# Altium PCB PCB_PH.PcbDoc
Units mil, origin at the board's own origin, x right, y up, seen from the top; angles counter-clockwise.
Board outline 2598.43 x 2519.69 mil, 2 copper layers (Top Layer, Bottom Layer); 26 components, 22 nets, 84 pads, 51 vias.
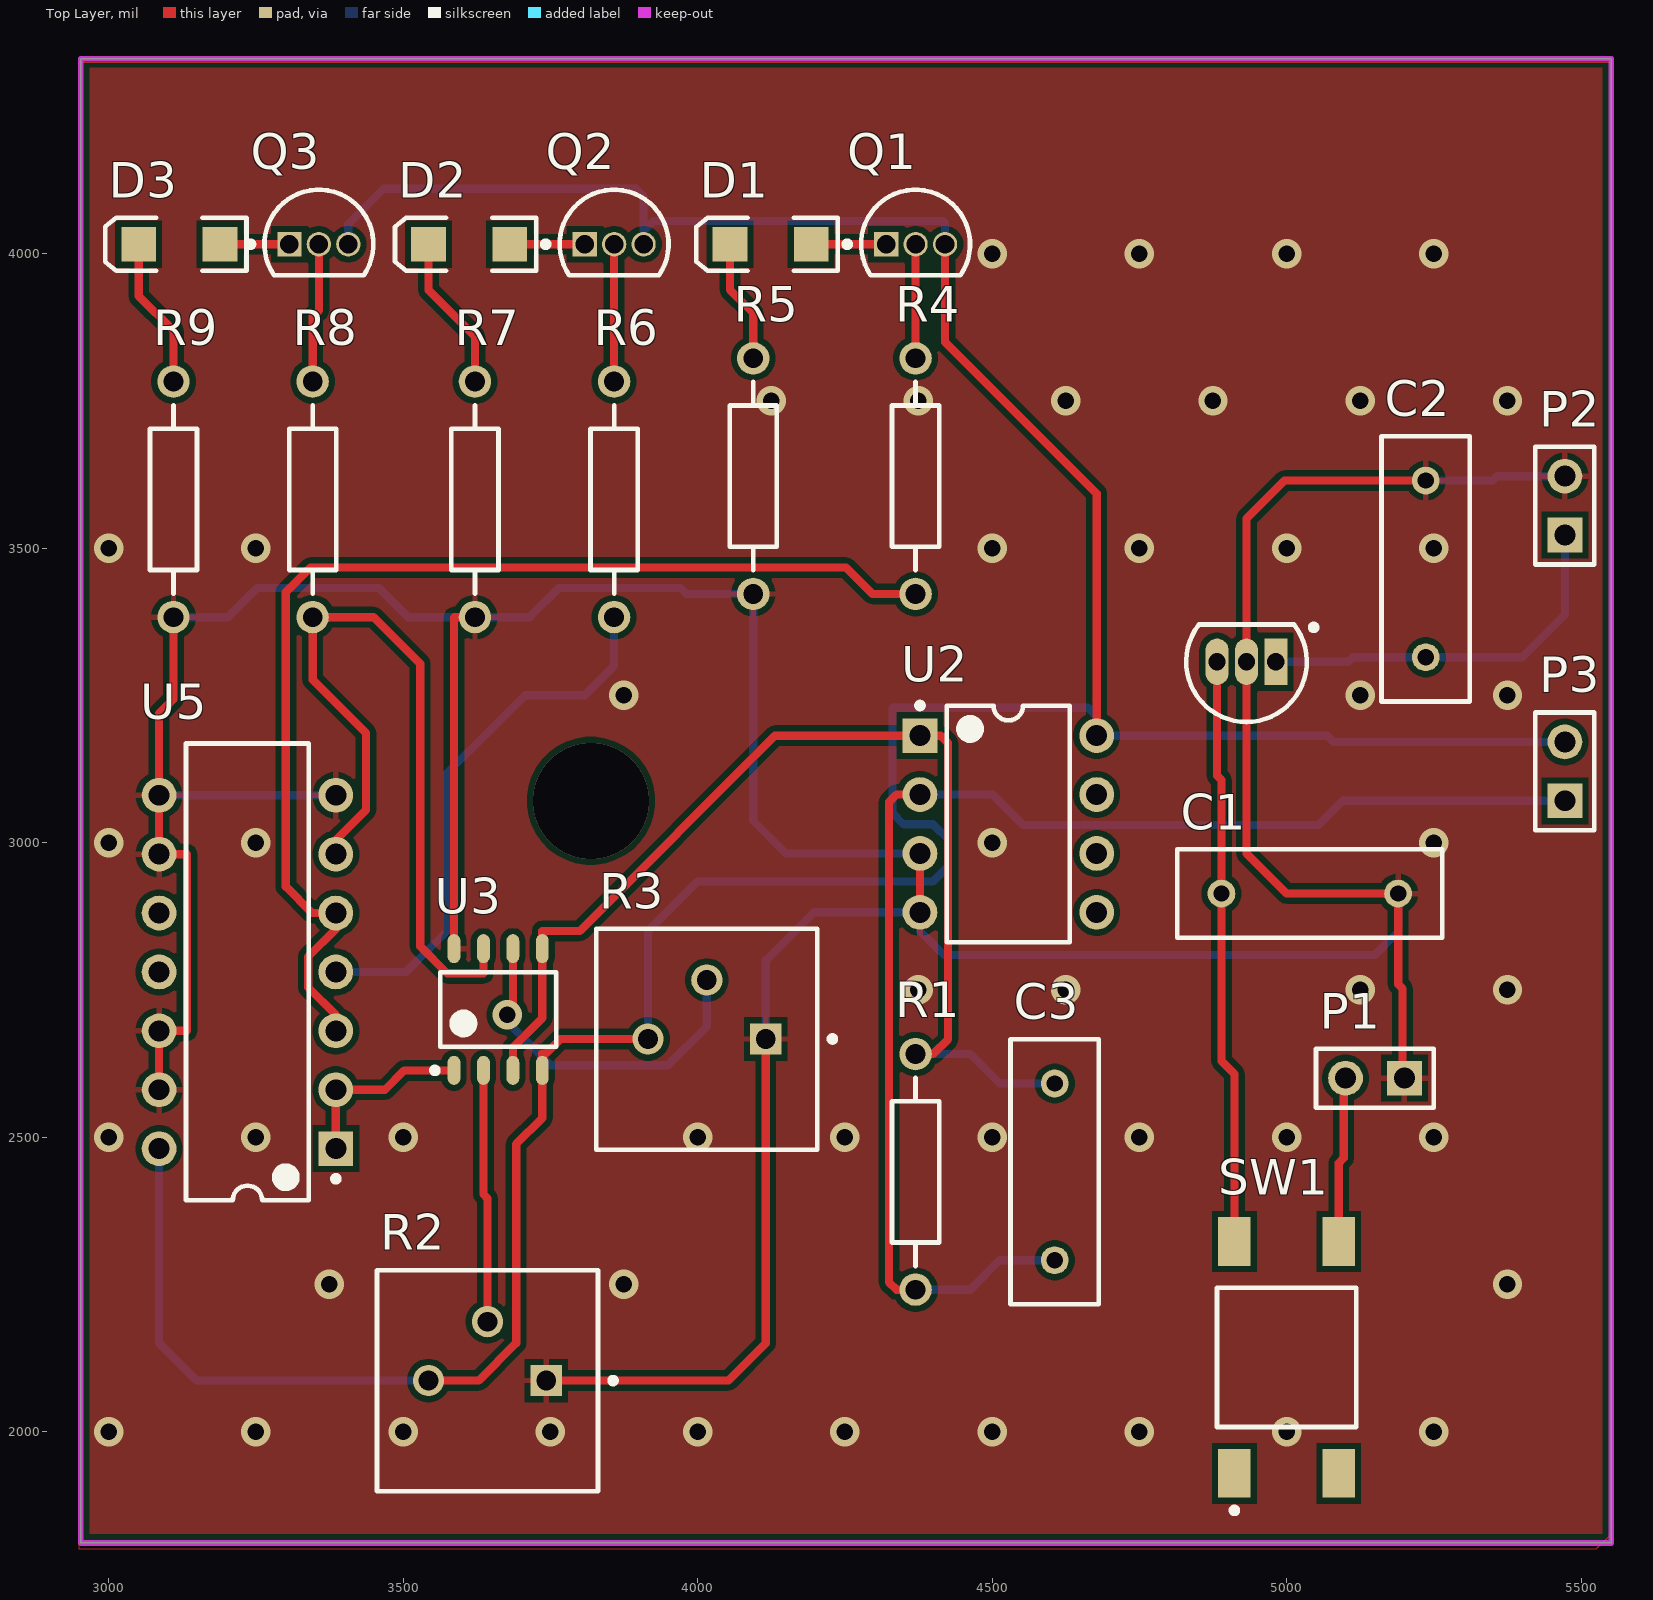
[diagram p0: Top Layer view]
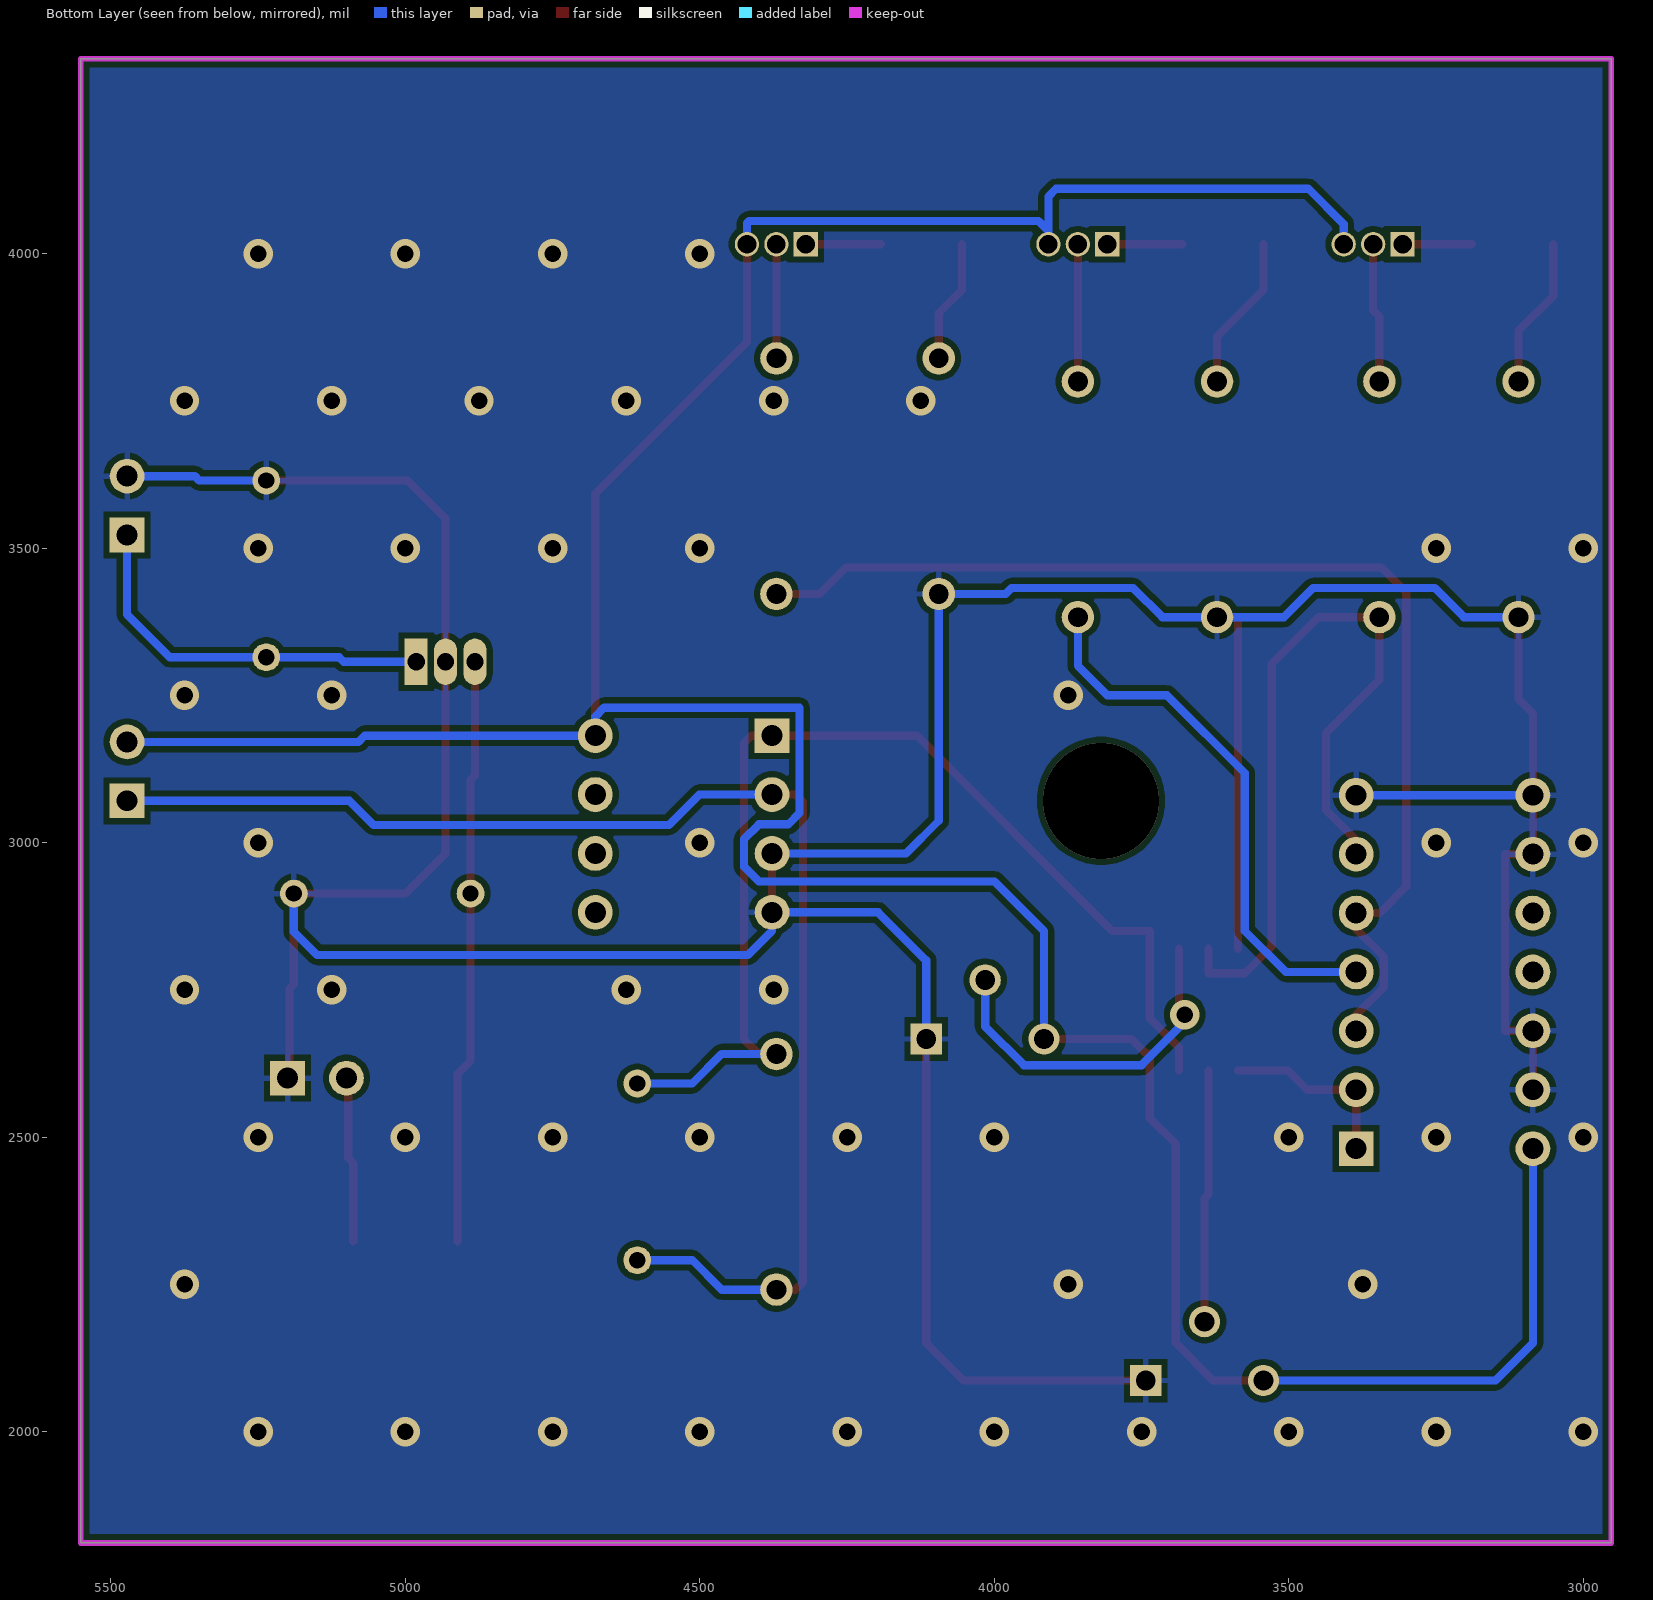
[diagram p1: Bottom Layer view, seen from below]

## Layer stack, top to bottom
Top Solder: solder mask 0.4, Solder Resist, Dk 3.5
Top Layer: signal copper 1.4
Dielectric 1: dielectric 12.6, FR-4, Dk 4.8
Bottom Layer: signal copper 1.4
Bottom Solder: solder mask 0.4, Solder Resist, Dk 3.5

## Board outline
2952.76,1811.02 5551.18,1811.02 5551.18,4330.71 2952.76,4330.71

## Design rules (kind name [scope] priority, off if disabled: settings)
Clearance [All] p1: gap=10 ignorepadtopadclearanceinfootprint=FALSE except(0: Arc-Hole Track-Hole SMDPad-Hole THPad-Hole Via-Hole Fill-Hole Poly-Hole Region-Hole Text-Hole)
PolygonConnect [All] p1: connectstyle=Relief reliefconductorwidth=10 reliefentries=4 polygonreliefangle="90 Angle" airgapwidth=10
RoutingVias [All] p1: holewidth=28 width=50 viastyle="Through Hole" minholewidth=28 minwidth=50 maxholewidth=28 maxwidth=50
SolderMaskExpansion [All] p1: expansion=4 istentingtop=FALSE
Width [All] p1: maxlimit=14 minlimit=14 preferedwidth=14 minimp=50.000000 maximp=50.000000 favimp=50.000000
30 further rules are at their usual default settings.

## Classes and differential pairs
component class Schemat_Julia_Polak: C1 C2 C3 D1 D2 D3 P1 P2 P3 Q1 Q2 Q3 R1 R2 R3 R4 R5 R6 R7 R8 R9 SW1

## Components (designator, comment, footprint, x,y, rotation, side; value= is the part's Value field where it differs from the comment)
C1 "Cap" RAD-0.3 5039.37,2913.39 r180 top value=0.47uF
C2 "Cap" RAD-0.3 5236.22,3464.57 r270 top value=0.1uF
C3 "Cap" RAD-0.3 4606.3,2440.94 r90 top value=10nF
D1 "LED2" 3.2X1.6X1.1 4124.02,4015.75 r180 top
D2 "LED2" 3.2X1.6X1.1 3612.2,4015.75 r180 top
D3 "LED2" 3.2X1.6X1.1 3120.08,4015.75 r180 top
P1 "Złącze zasilania" HDR1X2 5200,2600 r180 top
P2 "Złącze diody laserowej" HDR1X2 5472.44,3522.05 r90 top
P3 "Fotodioda" HDR1X2 5472.44,3070.87 r90 top
Q1 "BC557C" ONSC-TO-92-3-29-11 4370.08,4015.75 r0 top
Q2 "BC557C" ONSC-TO-92-3-29-11 3858.27,4015.75 r0 top
Q3 "BC557C" ONSC-TO-92-3-29-11 3357.09,4015.75 r0 top
R1 "Res2" AXIAL-0.4 4370.08,2440.94 r90 top value=1Meg
R2 "3386P-1-104LF" BOUR-3386P 3643.31,2136.61 r180 top
R3 "3386P-1-104LF" BOUR-3386P 4015.75,2716.54 r180 top
R4 "Res2" AXIAL-0.4 4370.08,3622.05 r270 top value=10K
R5 "Res2" AXIAL-0.4 4094.49,3622.05 r90 top value=2K2
R6 "Res2" AXIAL-0.4 3858.27,3582.68 r270 top value=10K
R7 "Res2" AXIAL-0.4 3622.05,3582.68 r90 top value=2K2
R8 "Res2" AXIAL-0.4 3346.46,3582.68 r270 top value=10K
R9 "Res2" AXIAL-0.4 3110.24,3582.68 r90 top value=2K2
SW1 "1301.9315.24" FP-1301_9315_24-MFG 5000,2125.98 r90 top
U2 "TL072CP" P0008A 4527.56,3031.5 r0 top
U3 "LM393DT" STM-SO-8_D_L 3661.42,2716.54 r90 top
U5 "CD4011BE" N0014A 3235.83,2780.32 r180 top
? "LM78L05ACZ" Z03A 4931.89,3307.09 r90 top

## Footprints (in the part's own frame and the unit in brackets; to place one, negate y for a bottom-side part, rotate by r counter-clockwise, add the part's x,y. Pads: shape width x height; smd on the part's side, far side on the other; paste and mask are expansions set on the pad)
3.2X1.6X1.1 [mm] "SMT LED; 2 Flat Leads"
  rect 1.5x1.5 smd: 1(-1.75,0) 2(1.75,0)
  silkscreen extent -2.9,-1.15 3.2,1.15
AXIAL-0.4 [mm] "Axial Device, Thru-Hole; 2 Leads; 0.4 in Pin Spacing"
  round 1.4 hole 0.85: 1(-5.08,0) 2(5.08,0)
  silkscreen extent -4.06,-1.02 4.06,1.02
BOUR-3386P [mm] "THD, 3-Leads, Body 9.53x9.53mm, Pitch 2.54mm"
  rect 1.35x1.35 hole 0.85: 1(-2.54,1.27)
  round 1.35 hole 0.85: 2(0,-1.27) 3(2.54,1.27)
  silkscreen extent -5.54,-3.48 4.77,6.05, body extent -4.79,-3.52 4.79,6.06, height 4.95
FP-1301_9315_24-MFG [mm]
  rect 2.1x1.4 smd paste+0 mask+0: 1(-5,2.25) 2(5,2.25) 3(-5,-2.25) 4(5,-2.25)
  silkscreen extent -6.72,-3 3,3, body extent -6.15,-3.1 6.15,3.1, height 0.25
HDR1X2 [mm] "Connector; Header; 2 Position"
  rect 1.5x1.5 hole 0.9: 1(0,0)
  round 1.5 hole 0.9: 2(2.54,0)
  silkscreen extent -1.27,-1.27 3.81,1.27
N0014A [mm] "DIP, 14-Leads, Body 19.7x6.6mm, Pitch 2.54mm"
  rect 1.5x1.5 hole 0.9: 1(-3.81,7.62)
  round 1.5 hole 0.9: 2(-3.81,5.08) 3(-3.81,2.54) 4(-3.81,0) 5(-3.81,-2.54) 6(-3.81,-5.08) 7(-3.81,-7.62) 8(3.81,-7.62) 9(3.81,-5.08) 10(3.81,-2.54) 11(3.81,0) 12(3.81,2.54) 13(3.81,5.08) 14(3.81,7.62)
  silkscreen extent -3.94,-9.85 2.65,9.85, body extent -3.95,-9.85 3.95,9.85, height 5.08
ONSC-TO-92-3-29-11 [mm] "TO, 3-Leads, Body Dia 4.7mm, Pitch 1.27mm"
  rect 1.05x1.05 hole 0.8: 1(-1.27,0)
  round 1.05 hole 0.8: 2(0,0) 3(1.27,0)
  silkscreen extent -3.07,-1.34 2.35,2.35, body extent -2.35,-1.33 2.36,2.36, height 7.87
P0008A [mm] "DIP, 8-Leads, Body 10.15x6.6mm, Pitch 2.54mm"
  rect 1.5x1.5 hole 0.9: 1(-3.81,3.81)
  round 1.5 hole 0.9: 2(-3.81,1.27) 3(-3.81,-1.27) 4(-3.81,-3.81) 5(3.81,-3.81) 6(3.81,-1.27) 7(3.81,1.27) 8(3.81,3.81)
  silkscreen extent -3.93,-5.1 2.65,5.23, body extent -3.95,-5.07 3.95,5.07, height 5.08
RAD-0.3 [mm] "Radial Cap, Thru-Hole; 2 Leads; 0.3 in Pin Spacing"
  round 1.2 hole 0.7: 1(-3.81,0) 2(3.81,0)
  silkscreen extent -5.71,-1.91 5.72,1.9
STM-SO-8_D_L [mm] "SOIC, 8-Leads, Body 5x4mm, Pitch 1.27mm, IPC High Density"
  oval 1.25x0.55 smd: 1(-2.625,1.905) 2(-2.625,0.635) 3(-2.625,-0.635) 4(-2.625,-1.905) 5(2.625,-1.905) 6(2.625,-0.635) 7(2.625,0.635) 8(2.625,1.905)
  silkscreen extent -2.75,-2.5 1.6,2.85, body extent -3,-2.5 3,2.5, height 1.75
Z03A [mm] "TO, Flat Index; 3 In-Line, Axial Leads; Body Dia. 5mm; Leads 0.55 x 0.50 mm (max)"
  rect 2x1 hole 0.75: 1(0,-1.27)
  oval 2x1 hole 0.75: 2(0,0) 3(0,1.27)
  silkscreen extent -2.6,-3.03 1.6,2.6, body extent -2.6,-2.61 1.6,2.61, height 5.2

## Part data
C1 C2 C3: "Capacitor", LatestRevisionDate=17-Jul-2002, LatestRevisionNote="Re-released for DXP Platform.", PackageDescription="Radial Cap, Thru-Hole; 2 Leads; 0.3 in Pin Spacing", PackageReference=RAD-0.3, Published=8-Jun-2000, Publisher="Altium Limited"
D1 D2 D3: "Typical RED, GREEN, YELLOW, AMBER GaAs LED", LatestRevisionDate=17-Jul-2002, LatestRevisionNote="Re-released for DXP Platform.", PackageDescription="SM LED; 2 Flat Leads", PackageReference=3.2X1.6X1.1, PackageVersion=Feb-2002, Published=8-Jun-2000, Publisher="Altium Limited"
P1 P2 P3: library part "Header 2", "Header, 2-Pin", LatestRevisionDate=17-Jul-2002, LatestRevisionNote="Re-released for DXP Platform.", Publisher="Altium Limited"
Q1 Q2 Q3: library part CMP-1048-01449-1, "Amplifier Transistor, PNP Silicon, 3-Pin TO-92, Bulk Box", Manufacturer="On Semiconductor", ComponentLink1Description="Manufacturer URL", ComponentLink1URL=http://www.onsemi.com/, ComponentLink2Description=Datasheet, ComponentLink2URL=http://www.onsemi.com/pub_link/Collateral/BC556B-D.PDF, ComponentLink3Description="Package Specification", ComponentLink3URL=http://www.onsemi.cn/pub_link/Collateral/2N6426-D.PDF, DatasheetVersion="Rev. 3", IC Continuous (A)=-0.1, Mounting Technology="Through Hole", PackageDescription="3-Pin Transistor Outline, Body 4.825 x 3.685 mm, Pitch 1.27 mm", PackageReference=TO-92-3-29-11_AM_SL, PackageVersion="Rev. AM", Packing="Bulk Box", PartNumber=BC557C, Polarity=PNP, RoHS=FALSE
R1 R4 R5 R6 R7 R8 R9: "Resistor", LatestRevisionDate=17-Jul-2002, LatestRevisionNote="Re-released for DXP Platform.", PackageDescription="Axial Device, Thru-Hole; 2 Leads; 0.4 in Pin Spacing", PackageReference=AXIAL-0.4, Published=8-Jun-2000, Publisher="Altium Limited"
R2 R3: library part CMP-2000-05592-1, "Square Trimpot(R) Trimming Potentiometer, 100 KOhm, +/- 10%, 0.5 W, -55 to 125 degC, 3-Pin THD, RoHS, Tube", Manufacturer=Bourns, Manufacturer Series=3386, Maximum Operating Temperature=125C, Minimum Operating Temperature=-55C, Operating Temperature-Max (Cel)=125, Operating Temperature-Min (Cel)=-55, Package=RectangularPackage, Package Description="3-Pin Through Hole Device, Body 9.53 x 9.53 mm, Pitch 2.54 mm", Package Reference=3386P, Power Rating=1/2W, Rated Power Dissipation (P) (W)=0.5, Rated Temperature (Cel)=85, Resistance (ohm)=100000, Resistance Law=Linear, Resistance Value=100KOhm, Resistive Element Material=Cermet, Temperature Coefficient=100ppm/C, Tolerance=10%, Tolerance (%)=10, Actuator Orientation=Vertical, Actuator Type=Screw, Datasheet URL=http://www.bourns.com/docs/Product-Datasheets/3386.pdf, Datasheet Version=05/2016, Family=3386, Lead Free=NO, Manufacturer URL=http://www.bourns.com/, Mounting=ThroughHole, Mounting Feature=ThroughHole, Mounting Technology=ThroughHole, Number of Terminals=3, Number of Turns=1, Packaging=Tube, Product Depth=9.53mm, Product Height=4.83mm, Product Length=9.53mm, Product Type=Potentiometer, Shaft Diameter=3.15mm, Technology=Cermet, Terminal Finish=TINLEAD, Terminal Shape=WIRE, Termination Style=Pin, Type=Trimmer
SW1: library part CMP-26321-000002-1, "SWITCH TACTILE SPST-NO 0.05A 12V", Case/Package=SMD/SMT, Current Rating=50mA, Max Operating Temperature=70°C, Max Voltage Rating (DC)=12V, Min Operating Temperature=-20°C, Operating Force=1.6N, Package Quantity=1000, Ratings=IP40, Actuator Type=Standard, Contact Plating=Silver, Depth=10mm, Illumination Type=Illuminated, Length=6mm, Max Current Rating=50mA, Mechanical Life=100000Cycles, Mount="Surface Mount", Orientation=Straight, Packaging="Tape and Reel", Radiation Hardening=No, REACH SVHC="No SVHC", RoHS Compliant=Yes, Series=LSH, Switch Function=Off-Mom, Switch Travel=0.25mm, Termination="Gull Wing", Throw Configuration=SPST, Voltage Rating (AC)=12V, Voltage Rating (DC)=12V
U2: library part CMP-0017-00950-2, "Dual Low-Noise JFET-Input General-Purpose Operational Amplifier, 7 to 36 V, 0 to 70 degC, 8-pin DIP (P8), Pb-Free (RoHS)", Manufacturer="Texas Instruments", Rating=Catalog, Total Supply Voltage(Max)(+5V is 5, +/-5V is 10)=36, Total Supply Voltage(Min)(+5V is 5, +/-5V is 10)=7, CMRR(Min)(dB)=70, Code_JEDEC=MS-001, ComponentLink1Description="Manufacturer URL", ComponentLink1URL=http://www.ti.com/, ComponentLink2Description=Datasheet, ComponentLink2URL=http://www.ti.com/lit/ds/symlink/tl072.pdf, ComponentLink3Description="Package Specification", ComponentLink3URL=http://www.ti.com/litv/pdf/mpdi001b, DatasheetVersion=SLOS080J, Eco-Plan="Pb-Free (RoHS)", GBW(Typ)(MHz)=3, IIB(Max)(pA)=200, Iq per channel(Max)(mA)=2.5, Mounting Technology="Through Hole", Number of Channels=2, Offset Drift(Typ)(uV/C)=18, PackageDescription="8-Pin Plastic In-Line, Body 9.59 x 6.35 mm, Pitch 2.54 mm", PackageReference=P0008A, PackageVersion="4040082/E, 04/2010", PartNumber=TL072CP, Slew Rate(Typ)(V/us)=13, Sub Family="General Purpose Amplifier, High Supply Voltage Amplifier (>=30V)", Vio (25C)(Max)(mV)=10, Vn at 1kHz(Typ)(nV/rtHz)=18
U3: library part CMP-2000-06550-1, "Low-Power, Dual-Voltage Comparator, 2 to 36 V, 0 to 70 degC, 8-Pin SOIC (SO), RoHS, Tape and Reel", Current - Input Bias (Max)=0.25µA@5V, Current - Output (Typ)=18mA@5V, Current - Quiescent (Max)=2.5mA, Manufacturer=STMicroelectronics, Operating Temperature=0°C~70°C, Package / Case="8-SOIC(0.154\",3.90mmWidth)", Package Description="8-Pin Small Outline Integrated Circuit, Body 4.9 x 3.9 mm, Pitch 1.27 mm", Package Reference=SO-8, Standard Package=2,500, Supplier Device Package=8-SO, Voltage - Input Offset (Max)=5mV@30V, Voltage - Supply, Single/Dual (±)=2V~36V,±1V~18V, Category=IntegratedCircuits(ICs), Datasheet URL=http://www.st.com/content/ccc/resource/technical/document/datasheet/group1/b4/cc/cf/13/18/28/44/f5/CD00000465/files/CD00000465.pdf/jcr:content/translations/en.CD00000465.pdf, Datasheet Version="Rev. 15, 02/2016", EDA / CAD Models=DownloadfromAcceleratedDesigns, Family=Linear-Comparators, Manufacturer URL=http://www.st.com/, Mounting Technology=SurfaceMount, Mounting Type=SurfaceMount, Number of Elements=2, Online Catalog=Comparators-2elements, Other Names=497-1593-2, Other Related Documents=LM393ViewAllSpecificationsLM393ViewAllSpecifications, Output Type=CMOS,DTL,ECL,MOS,Open-Collector,TTL, Packaging=Tape&Reel(TR), Type=GeneralPurpose
U5: library part CMP-1627-00488-2, "CMOS Quad 2-Input NAND Gate, N0014A, TUBE", F @ Nom Voltage(Max)(Mhz)=8, Generic Part Number=CD4011B, ICC @ Nom Voltage(Max)(mA)=0.015, Manufacturer="Texas Instruments", Operating Temperature Range(C)="-55 to 125", Rating=Military, Voltage(Nom)(V)=10, Bits(#)=4, Code_JEDEC=MS-001, DatasheetVersion=SCHS021D, Input Type=CMOS, Output Drive (IOL/IOH)(Max)(mA)=1.5/-1.5, Output Type=CMOS, PackageReference=N0014A, Schmitt Trigger=No, Technology Family=CD4000, VCC(Max)(V)=18, VCC(Min)(V)=3
?: library part CMP-0062-00042-2, "3-Terminal Positive Regulators, 3-pin TO-92", Manufacturer="National Semiconductor", PackageTopMarking=NSXYTT*LM78L*05ACZ, PowerWise=N, Code_JEDEC=TO-226-AA, ComponentLink1Description="LM78L05 Datasheet", ComponentLink1URL=http://www.national.com/ds/LM/LM78L05.pdf, ComponentLink2Description="LM78L05 Web Page", ComponentLink2URL=http://www.national.com/pf/LM/LM78L05.html, ComponentLink3Description="Z03A Package Page", ComponentLink3URL=http://www.national.com/packaging/folders/z03a.html, CompType="LDO IC", DatasheetVersion=Apr-2006, PackageDescription="TO-92, Molded, 3 Lead", PackageReference=Z03A, PackageVersion="revG, Sep-2000", PinCount=3, RevisionNote="Component URLs added", RoHS=N

## Via types
v1: diameter 50, hole 28, Top Layer to Bottom Layer, 50 vias
v2: diameter 196.85, hole 196.85, Top Layer to Bottom Layer, 1 vias

## Nets (pads, with @x,y where several pads share a name; then routed paths per layer and width w, separated by ;. In a path a pad name is that pad's centre, name@x,y a point inside that pad or via, vN(x,y) a via of type N, cw(c..) or ccw(c..) an arc to the next point about the centre after c; other vN are vias at no path point)
+5V: P3.2 Q1.3 Q2.3 Q3.3 R2.3 R3.3 U2.8 U3.4 U5.14 | length 6093.6
  Top Layer w14: R2.3 3628.61,2086.61 3692,2150 3692,2488 3736.42,2532.42 U3.4 3736.42,2642 3742.65,2642 3767.19,2666.54 R3.3 ; Q1.3 4420.08,3850 4677.56,3592.52 U2.8
  Bottom Layer w14: U5.14 3085.83,2150 3149.21,2086.61 R2.3 ; Q3.3 3407.09,4050 3467.09,4110 3895.27,4110 3908.27,4097 3908.27,4038.54 ; Q2.3 3908.27,4038.54 ; R3.3 3915.75,2850 3999.75,2934 4400,2934 4425,2959 4425,3006 4400,3031 4350,3031 4331,3050 4331,3229 4662.5,3229 4677.56,3213.94 U2.8 5069,3181.5 5079.63,3170.87 P3.2 ; Q1.3 4420.08,4051.92 4416.73,4055.27 3925,4055.27 3908.27,4038.54
GND: ?.2 C1.1 C2.1 P1.1 P2.2 R2.1 R3.1 R5.1 R7.1 R9.1 U2.3 U2.4 U3.8 U5.7 U5.8 U5.9 U5.12 U5.13 | length 7674.5
  Top Layer w14: U5.13 U5.12 3133,2680.32 3133,2980.32 U5.9 U5.8 3085.83,3219 3110.24,3243.41 R9.1 ; U3.8 3586.42,3382.68 R7.1 ; R2.1 4052.36,2086.61 4115.75,2150 R3.1 ; U2.4 U2.3 ; P1.1@5196.85,2598.42 5196.85,2752 5189.37,2759.48 C1.1 5000,2913.39 4931.89,2981.5 ?.2 4931.89,3550 4996.46,3614.57 C2.1
  Bottom Layer w14: U5.8 U5.7 ; R9.1 3203,3382.68 3252.32,3432 3459,3432 3508.32,3382.68 R7.1 3715,3382.68 3764.32,3432 3971,3432 3980.95,3422.05 R5.1 4094.49,3037.01 4150,2981.5 U2.3 ; R3.1 4115.75,2800 4197.24,2881.5 U2.4 4377.56,2850 4418.56,2809 5150,2809 5189.37,2848.37 C1.1 ; C2.1 5350,3614.57 5357.48,3622.05 P2.2
  other v1: 3000,2000 3250,2000 3500,2000 3750,2000 4000,2000 4250,2000 4500,2000 4750,2000 5000,2000 5250,2000 3375,2250 3875,2250 5375,2250 3000,2500 3250,2500 3500,2500 4000,2500 4250,2500 4500,2500 4750,2500 5000,2500 5250,2500 4375,2750 4625,2750 5125,2750 5375,2750 3000,3000 3250,3000 4500,3000 5250,3000 3875,3250 5125,3250 5375,3250 3000,3500 3250,3500 4500,3500 4750,3500 5000,3500 5250,3500 4125,3750 4375,3750 4625,3750 4875,3750 5125,3750 5375,3750 4500,4000 4750,4000 5000,4000 5250,4000
Net_1: ?.1 C2.2 P2.1 | length 658.7
  Bottom Layer w14: ?.1 5105,3307.09 5112.48,3314.57 C2.2 5400,3314.57 5472.44,3387.01 P2.1
Net_3: ?.3 C1.2 SW1.2 | length 996.5
  Top Layer w14: ?.3 4881.89,3113.48 4889.37,3106 C1.2 4889.37,2629.05 4911.42,2607 SW1.2
NetC3_1: C3.1 P3.1 R1.1 U2.2 | length 2313.6
  Top Layer w14: R1.1 4337.5,2240.94 4325,2253.44 4325,3069 4337.5,3081.5 U2.2
  Bottom Layer w14: R1.1 4463,2240.94 4513,2290.94 C3.1 ; U2.2 4501,3081.5 4552.5,3030 5054,3030 5094.87,3070.87 P3.1
NetC3_2: C3.2 R1.2 U2.1 U3.3 U3.5 | length 1913.9
  Top Layer w14: U3.3 3686.42,2652.41 3736.42,2702.41 U3.5 3736.42,2850 3800,2850 4131.5,3181.5 U2.1 4412.5,3181.5 4425,3169 4425,2665.94 4400,2640.94 R1.2
  Bottom Layer w14: R1.2 4463,2640.94 4513,2590.94 C3.2
NetD1_1: D1.1 Q1.1 | length 127.2
  Top Layer w14: D1.1 Q1.1
NetD1_2: D1.2 R5.2 | length 210
  Top Layer w14: D1.2 4055.12,3938.37 4094.49,3899 R5.2
NetD2_1: D2.1 Q2.1 | length 127.2
  Top Layer w14: D2.1 Q2.1
NetD2_2: D2.2 R7.2 | length 265.7
  Top Layer w14: D2.2 3543.31,3937.74 3622.05,3859 R7.2
NetD3_1: D3.1 Q3.1 | length 118.1
  Top Layer w14: D3.1 Q3.1
NetD3_2: D3.2 R9.2 | length 257.5
  Top Layer w14: D3.2 3051.18,3928.05 3110.24,3869 R9.2
NetP1_2: P1.2 SW1.4 | length 279
  Top Layer w14: SW1.4 5088.58,2456 5096.85,2464.27 P1.2@5096.85,2598.42
NetQ1_2: Q1.2 R4.1 | length 193.7
  Top Layer w14: R4.1 Q1.2
NetQ2_2: Q2.2 R6.1 | length 233.1
  Top Layer w14: R6.1 Q2.2
NetQ3_2: Q3.2 R8.1 | length 237.5
  Top Layer w14: R8.1 3346.46,3893 3357.09,3903.63 Q3.2
NetR2_2: R2.2 U3.2 | length 429.4
  Top Layer w14: U3.2 3636.42,2402.89 3643.31,2396 R2.2
NetR3_2: R3.2 U3.6 | length 603.8
  Top Layer w14: v1(3677,2708) 3686.42,2717.42 U3.6
  Bottom Layer w14: v1(3677,2708) 3677,2695 3750,2622 3950,2622 4015.75,2687.75 R3.2
NetR4_2: R4.2 U5.3 U5.5 | length 1947.2
  Top Layer w14: U5.3 3385.83,2707.17 3339,2754 3339,2806.17 3385.83,2853 U5.5 3345.68,2880.32 3301,2925 3301,3425 3343,3467 4252.05,3467 4297,3422.05 R4.2
NetR6_2: R6.2 U5.4 | length 927.4
  Bottom Layer w14: U5.4 3505.32,2780.32 3575,2850 3575,3118 3707,3250 3808.27,3250 3858.27,3300 R6.2
NetR8_2: R8.2 U3.7 U5.6 | length 1324.4
  Top Layer w14: U5.6 3385.83,3004 3437,3055.17 3437,3186 3346.46,3276.54 R8.2 3450,3382.68 3529,3303.68 3529,2824 3575,2778 3636.42,2778 U3.7
NetU3_1: U3.1 U5.1 U5.2 | length 314.2
  Top Layer w14: U5.1 U5.2 3469,2580.32 3501.87,2613.19 U3.1
pads on no net: SW1.1 SW1.3 U2.5 U2.6 U2.7 U5.10 U5.11
copper on no net:
  other v2: 3818.9,3070.87

## Polygon pours and split planes (outlines as drawn)
GND on Top Layer "GND_L01_P002" (solid, pour order 2): 2950,4325 5550,4325 5550,1825 5537.5,1812.5 2962.5,1812.5 2950,1825
no net on Top Layer "NONET_L01_P000" (solid, pour order 0): 2950,4325 5550,4325 5550,1825 5525,1800 2950,1800
GND on Bottom Layer "GND_L02_P003" (solid, pour order 3): 2950,4325 5550,4325 5550,1800 2950,1800

## Keep-outs
Keep-Out Layer:
  lines w10: 2952.76,1811.02 2952.76,2362.2 2952.76,4330.71 5551.18,4330.71 5551.18,1811.02 2952.76,1811.02